# Altium PCB Copy of PCB1.PcbDoc
Units mil, origin at the board's own origin, x right, y up, seen from the top; angles counter-clockwise.
Board outline 1840 x 2165 mil, 4 copper layers (Top Layer, Int1 (GND), Int2 (SIGNAL), Bottom Layer), stack 43.712 mil thick; 22 components, 24 nets, 92 pads, 12 vias.
Unrouted connection lines stored in the file: 26.
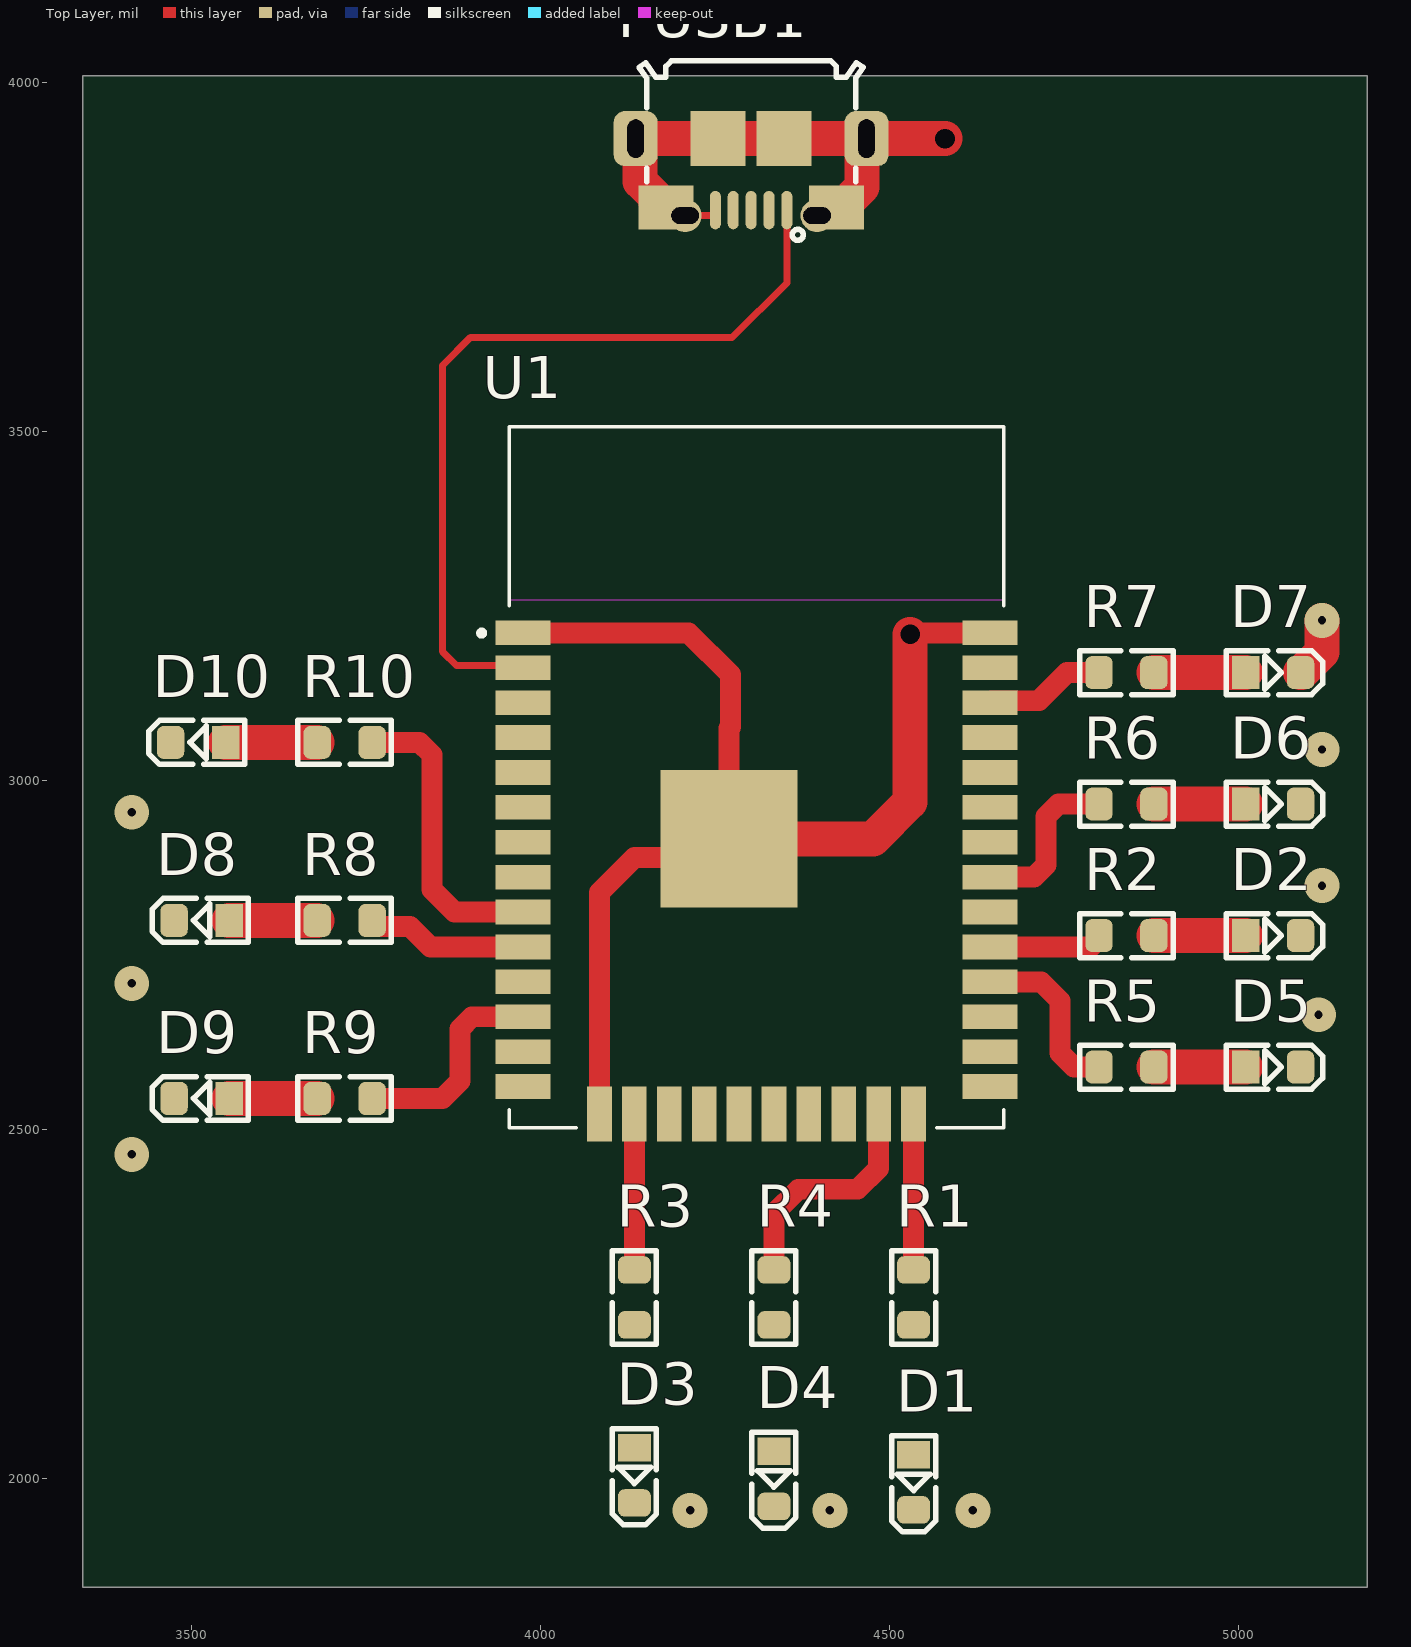
[diagram p0: Top Layer view]
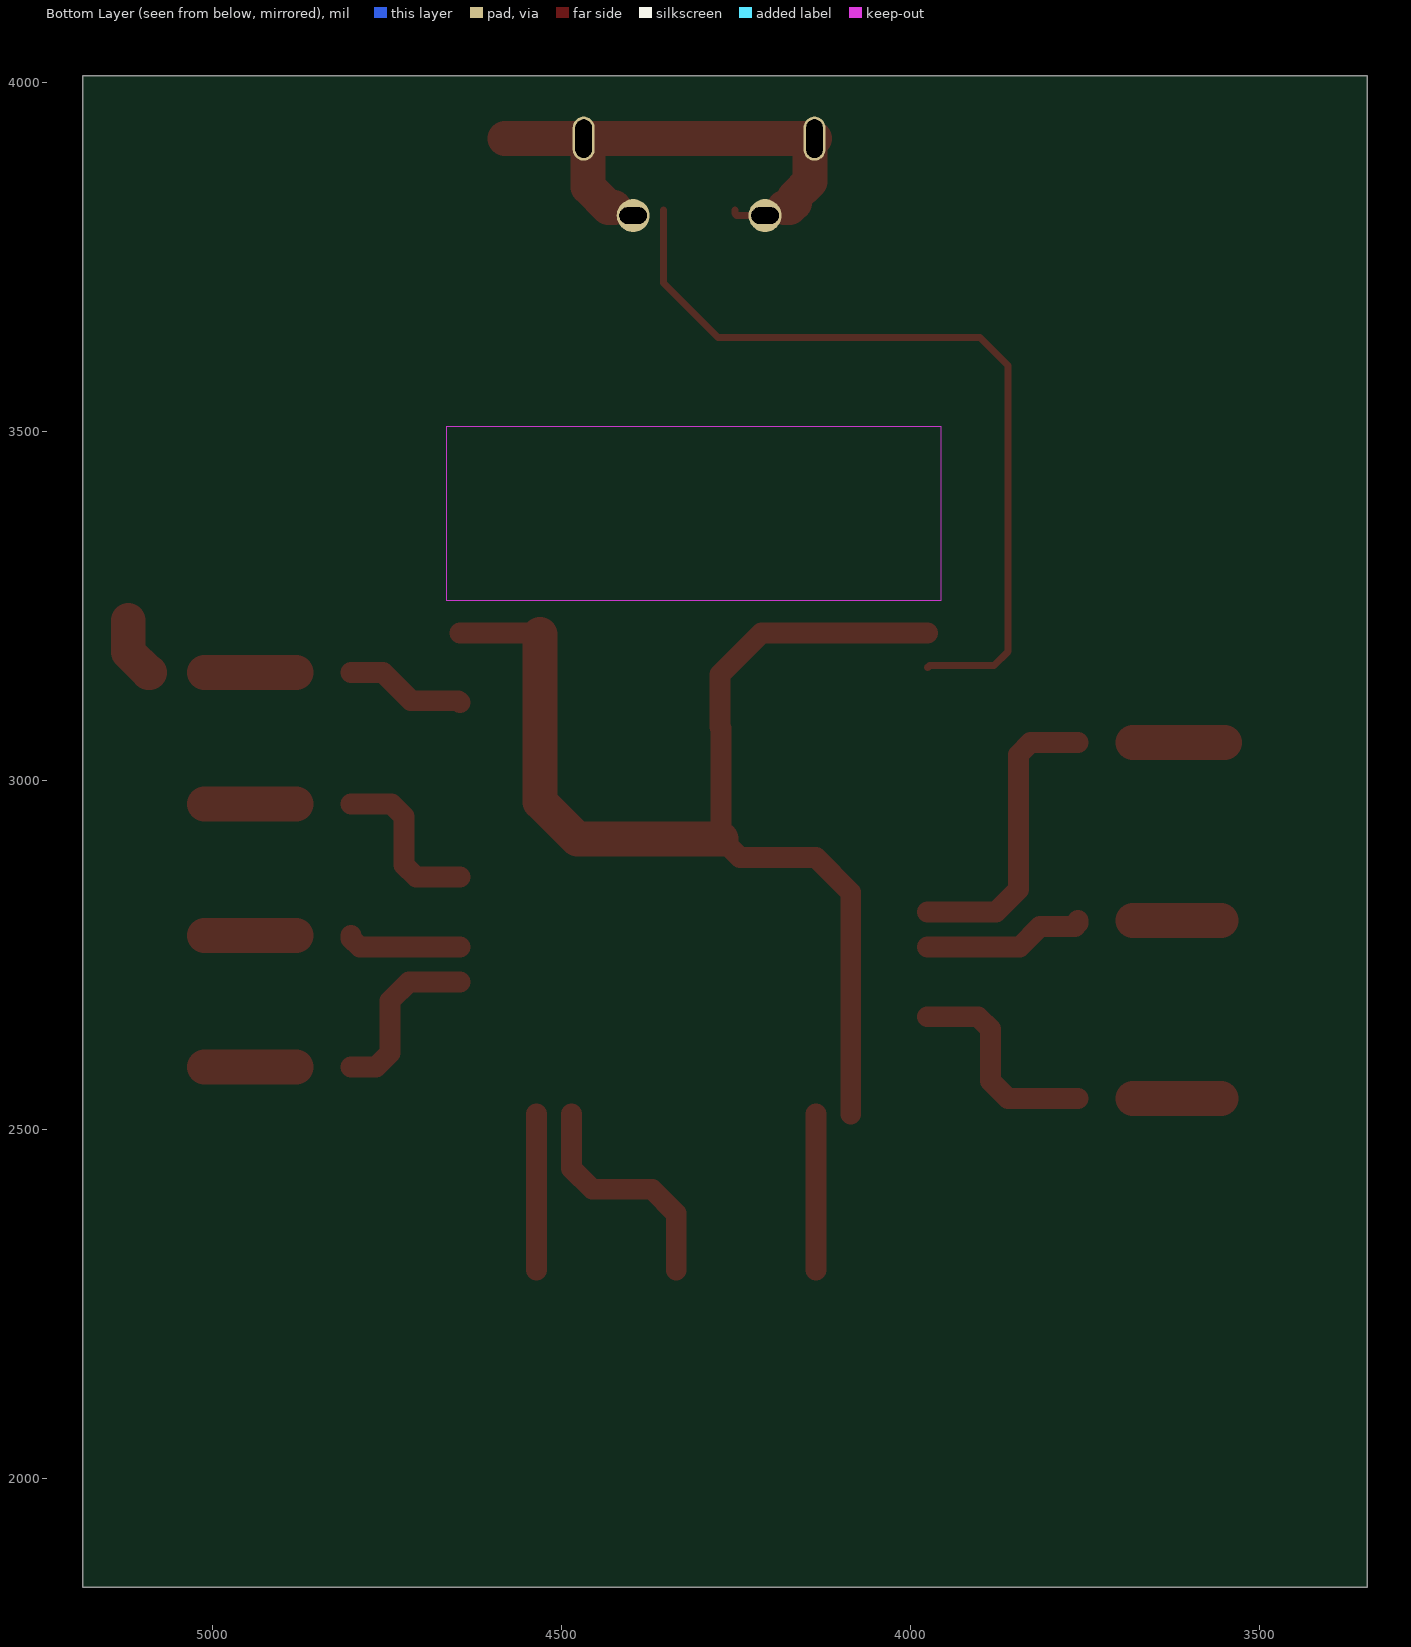
[diagram p1: Bottom Layer view, seen from below]
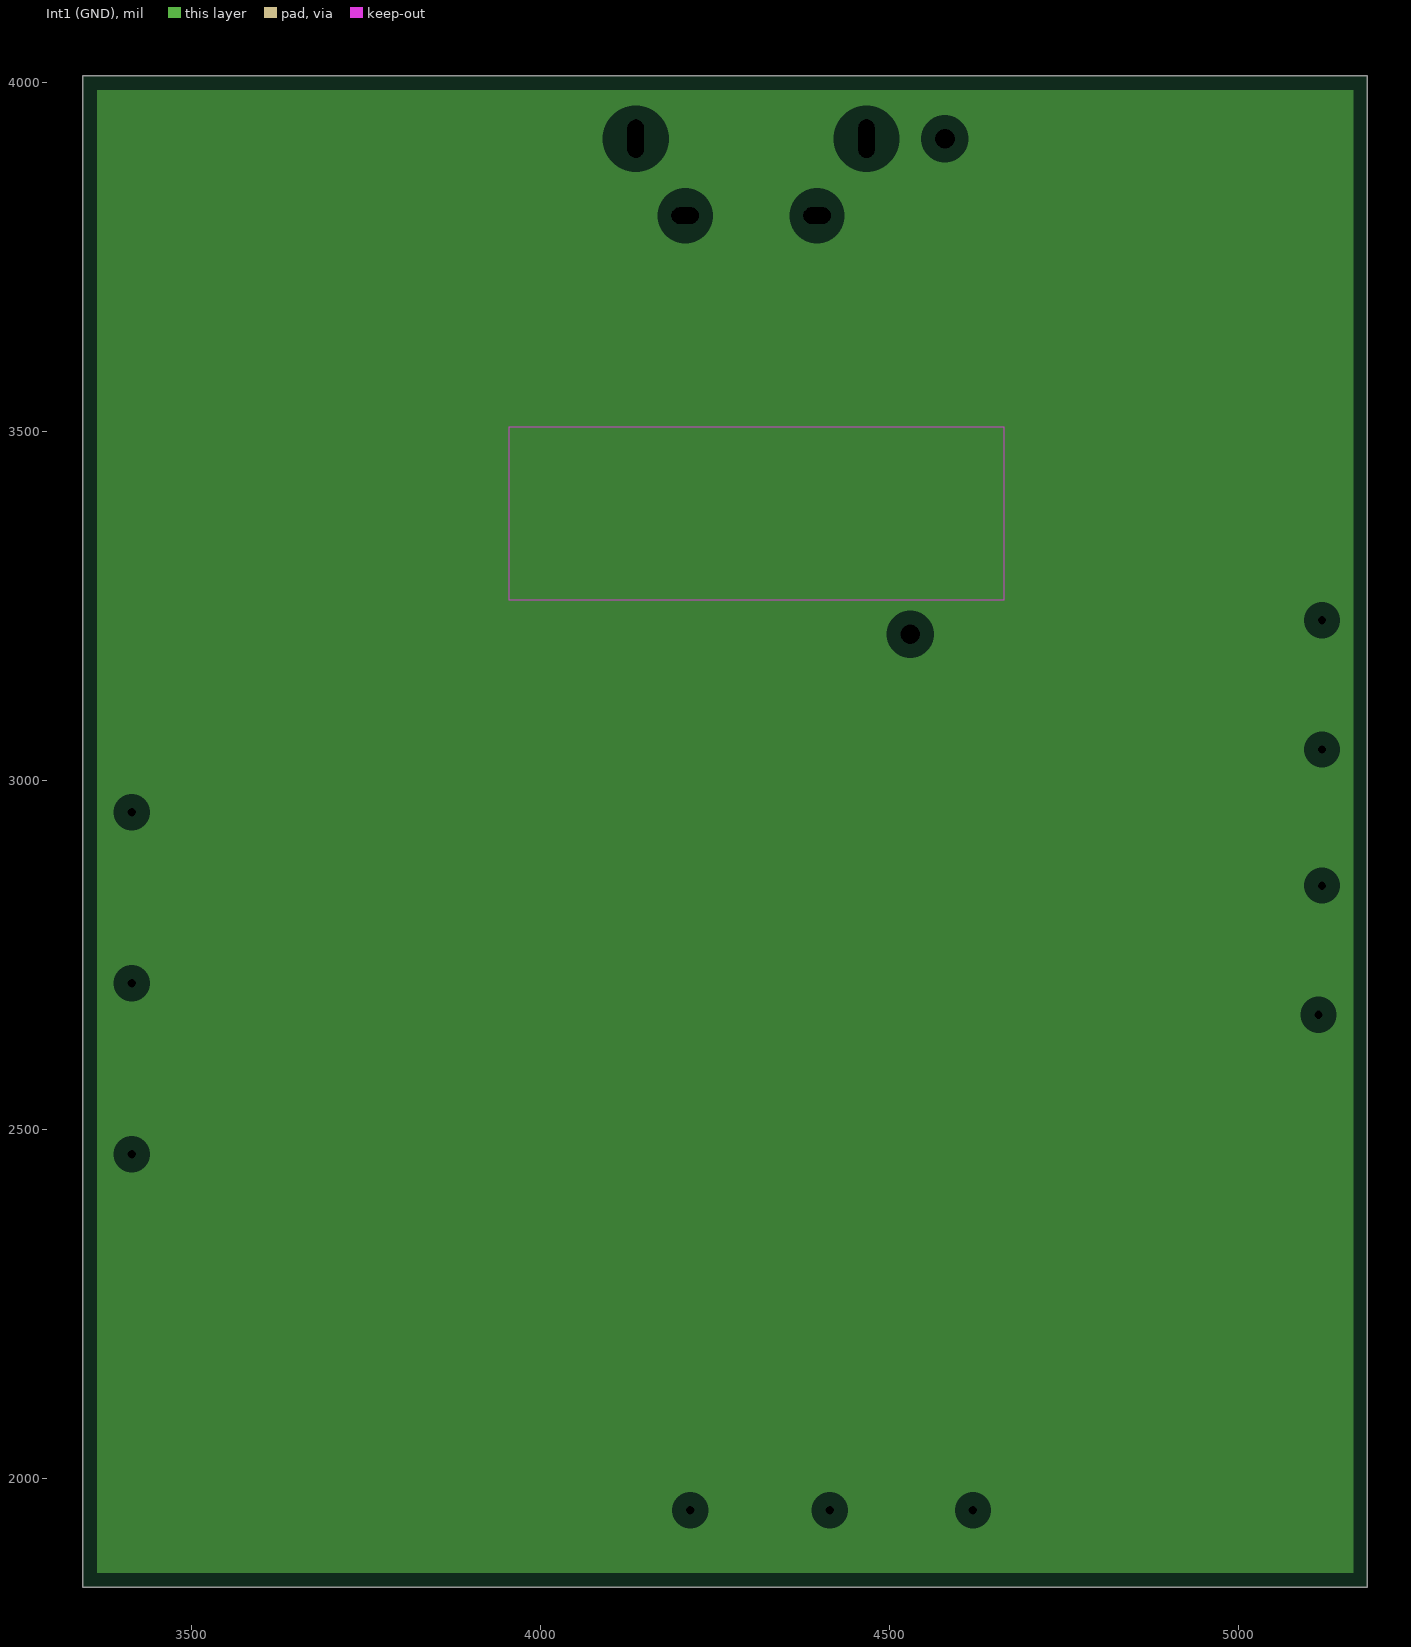
[diagram p2: Int1 (GND), clearances drawn from the general rule]
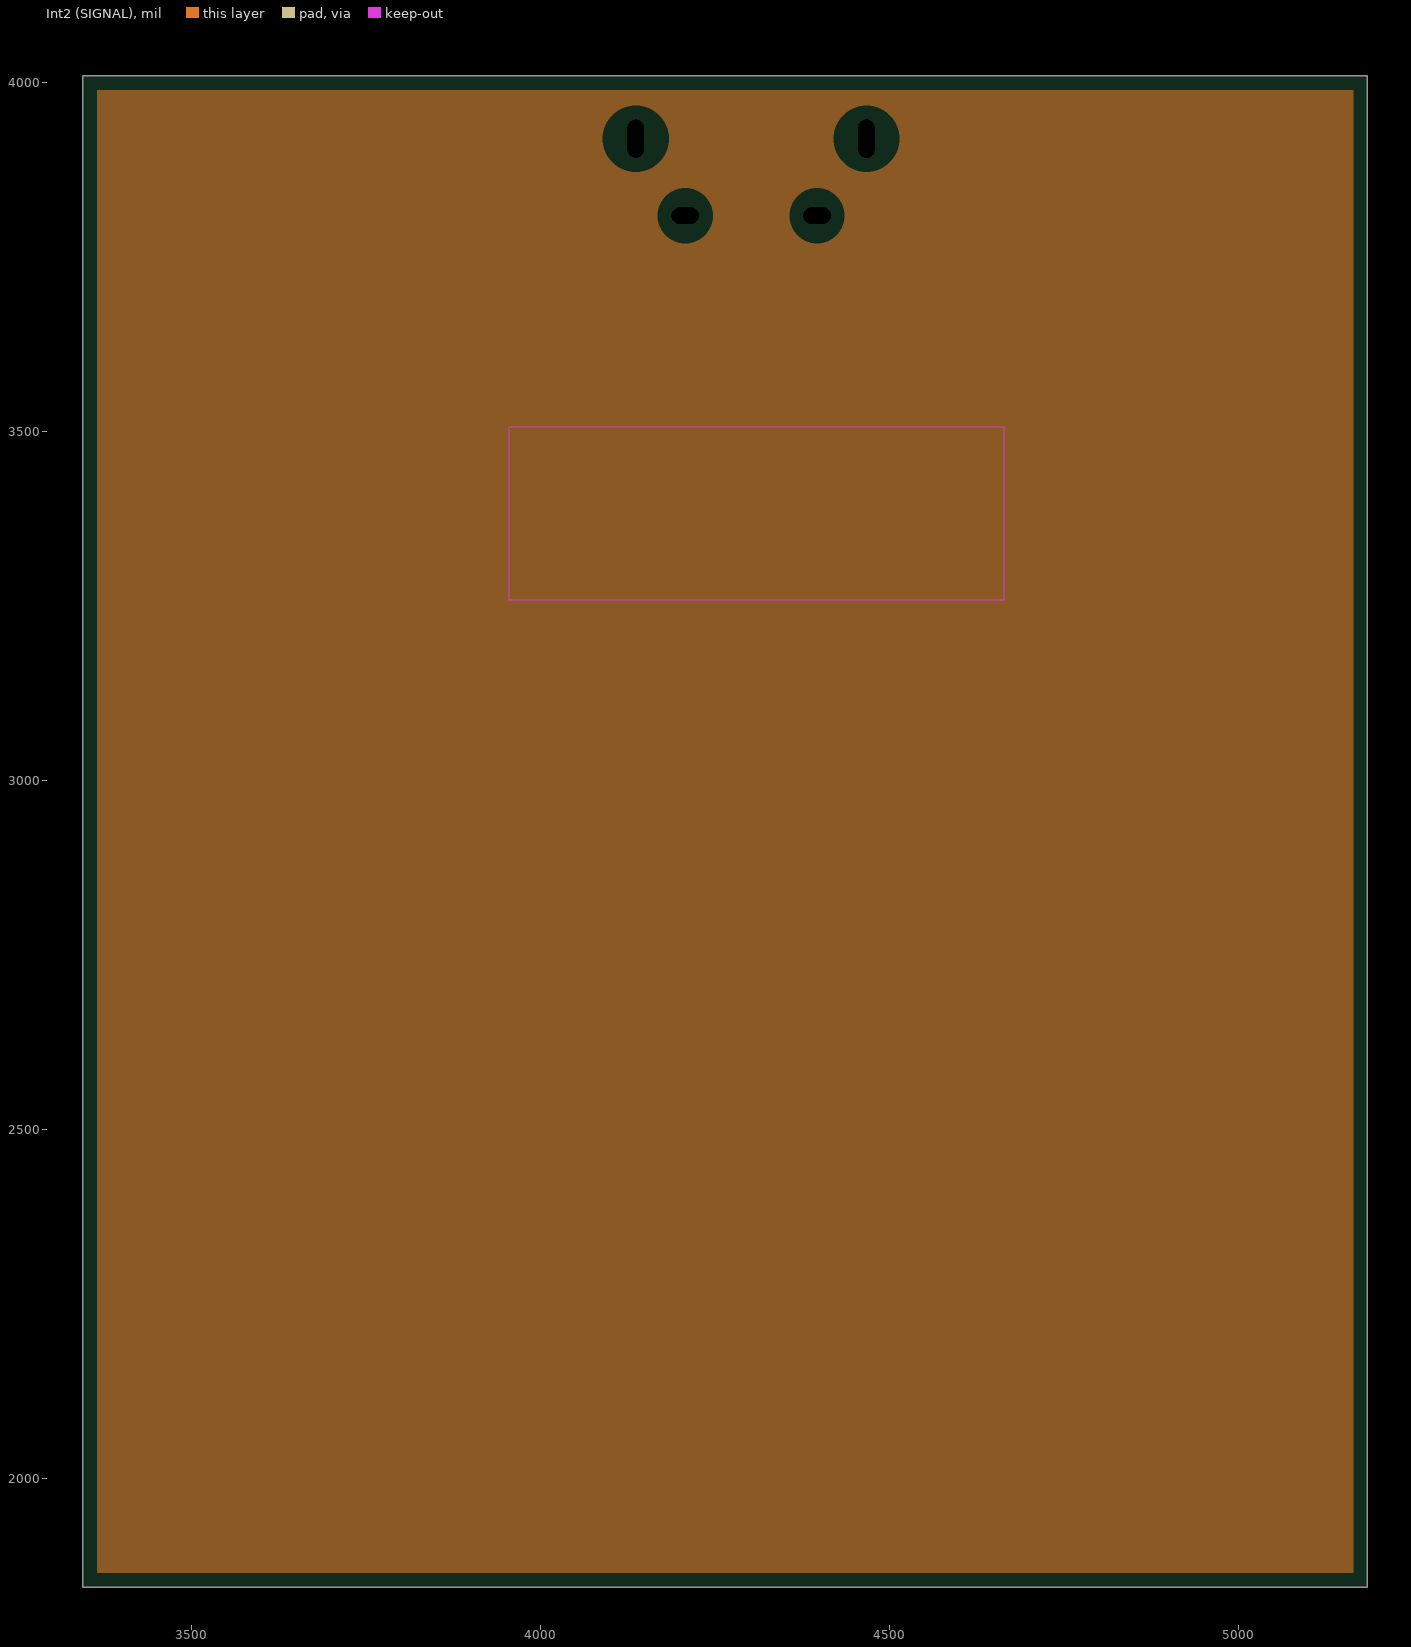
[diagram p3: Int2 (SIGNAL), clearances drawn from the general rule]

## Layer stack, top to bottom
Top Solder: solder mask 1, SM-001, Dk 4
Top Layer: signal copper 1.378
Dielectric 1: prepreg 5.1, PP-017, Dk 4.3
Int1 (GND): plane copper 1.378, net GND
Dielectric 3: core 28, Core-039, Dk 4.8
Int2 (SIGNAL): plane copper 1.378
Dielectric 5: prepreg 5.1, PP-017, Dk 4.3
Bottom Layer: signal copper 1.378
Bottom Solder: solder mask 1, SM-001, Dk 4

## Board outline
3345,1845 5185,1845 5185,4010 3345,4010

## Design rules (kind name [scope] priority, off if disabled: settings)
Clearance [All] p1: gap=10 ignorepadtopadclearanceinfootprint=FALSE except(0: Arc-Hole Track-Hole SMDPad-Hole THPad-Hole Via-Hole Fill-Hole Poly-Hole Region-Hole Text-Hole)
PlaneClearance [All] p1: clearance=20
PlaneConnect [All] p1: planeconnectstyle=Relief reliefexpansion=20 reliefentries=4 reliefconductorwidth=10 reliefairgap=10
PolygonConnect [All] p1: connectstyle=Relief reliefconductorwidth=10 reliefentries=4 polygonreliefangle="90 Angle" airgapwidth=10
RoutingVias [All] p1: holewidth=28 width=50 viastyle="Through Hole" minholewidth=28 minwidth=50 maxholewidth=28 maxwidth=50
SolderMaskExpansion [All] p1: expansion=4 istentingtop=FALSE
SupplyNets "Schematic Supply Nets_1" [InNet('VCC')] p1: voltage=0.000
SupplyNets "Schematic Supply Nets" [InNet('GND')] p2: voltage=0.000
Width [All] p1: maxlimit=50 minlimit=10 preferedwidth=30 minimp=50.000000 maximp=50.000000 favimp=50.000000
28 further rules are at their usual default settings.

## Components (designator, comment, footprint, x,y, rotation, side; value= is the part's Value field where it differs from the comment)
D1 "LED0805" LED0805 4535,1995 r270 top
D2 "LED0805" LED0805 5050,2778.33 r0 top
D3 "LED0805" LED0805 4135,2005 r270 top
D4 "LED0805" LED0805 4335,2000 r270 top
D5 "LED0805" LED0805 5050,2590 r0 top
D6 "LED0805" LED0805 5050,2966.67 r0 top
D7 "LED0805" LED0805 5050,3155 r0 top
D8 "LED0805" LED0805 3515,2800 r180 top
D9 "LED0805" LED0805 3515,2545 r180 top
D10 "LED0805" LED0805 3510,3055 r180 top
PUSB1 "CONN_USB_MICROB" USB_MICRO_B_BM_SHS 4302.24,3817.64 r0 top
R1 "330 ohms" R0805 4535,2260 r270 top
R2 "330 ohms" R0805 4840,2778.33 r0 top
R3 "330 ohms" R0805 4135,2260 r270 top
R4 "330 ohms" R0805 4335,2260 r270 top
R5 "330 ohms" R0805 4840,2590 r0 top
R6 "330 ohms" R0805 4840,2966.67 r0 top
R7 "330 ohms" R0805 4840,3155 r0 top
R8 "330 ohms" R0805 3720,2800 r180 top
R9 "330 ohms" R0805 3720,2545 r180 top
R10 "330 ohms" R0805 3720,3055 r180 top
U1 "ESP32-WROOM-32(8MB)" MODULE_ESP32-WROOM-32(8MB) 4310,3005 r0 top

## Footprints (in the part's own frame and the unit in brackets; to place one, negate y for a bottom-side part, rotate by r counter-clockwise, add the part's x,y. Pads: shape width x height; smd on the part's side, far side on the other; paste and mask are expansions set on the pad)
LED0805 [mm] "LED SMD 0805"
  rect 1x1.2 smd paste-2 mask+0.075: 1(-1,0)
  rrect50% 1x1.2 smd paste-2 mask+0.075: 2(1,0)
  Top Layer pour cut-out: -0.5,0.8 0.5,0.8 0.5,-0.8 -0.5,-0.8
  silkscreen extent -1.7,-0.8 1.8,0.8, body extent -1.01,-0.62 1.01,0.63, height 1.1
MODULE_ESP32-WROOM-32(8MB) [mm]
  rect 2x0.9 smd: 1(-8.5,5.26) 2(-8.5,3.99) 3(-8.5,2.72) 4(-8.5,1.45) 5(-8.5,0.18) 6(-8.5,-1.09) 7(-8.5,-2.36) 8(-8.5,-3.63) 9(-8.5,-4.9) 10(-8.5,-6.17) 11(-8.5,-7.44) 12(-8.5,-8.71) 13(-8.5,-9.98) 14(-8.5,-11.25) 25(8.5,-11.25) 26(8.5,-9.98) 27(8.5,-8.71) 28(8.5,-7.44) 29(8.5,-6.17) 30(8.5,-4.9) 31(8.5,-3.63) 32(8.5,-2.36) 33(8.5,-1.09) 34(8.5,0.18) 35(8.5,1.45) 36(8.5,2.72) 37(8.5,3.99) 38(8.5,5.26)
  rect 0.9x2 smd: 15(-5.715,-12.25) 16(-4.445,-12.25) 17(-3.175,-12.25) 18(-1.905,-12.25) 19(-0.635,-12.25) 20(0.635,-12.25) 21(1.905,-12.25) 22(3.175,-12.25) 23(4.445,-12.25) 24(5.715,-12.25)
  rect 5x5 smd paste-3: 39(-1,-2.24)
  Keep-Out Layer region: 9,6.45 -9,6.45 -9,12.75 9,12.75
  silkscreen extent -10.1,-12.75 9,12.75, body extent -9,-12.75 9,12.75, height 3.2
R0805 [mm] "CHIP RESISTOR 1/8 WATT ,2.0X1.3mm, 0805, 2012"
  rrect50% 1x1.2 smd paste-0.1 mask+0.075: 1(-1,0) 2(1,0)
  Top Layer pour cut-out: -0.5,0.8 0.5,0.8 0.5,-0.8 -0.5,-0.8
  silkscreen extent -1.7,-0.8 1.7,0.8, body extent -1.15,-0.67 1.15,0.68, height 0.76
USB_MICRO_B_BM_SHS [mm] "CONN, USB Micro B - Standard (Bottom mount), Shell SMD, 473460001, ZX62-AB-5PA"
  oval 0.4x1.4 smd mask+0.05: 1(1.3,0) 2(0.65,0) 3(0,0) 4(-0.65,0) 5(-1.3,0)
  round 1.2 hole 0.6 slot 1 at 0 deg mask+0.05: SH1(-2.4,-0.2) SH2(2.4,-0.2)
  rect 2x2 smd: SH3(-1.2,2.6) SH4(1.2,2.6)
  rrect50% 1.6x2 / inner oval 0.8x1.6 / far side oval 0.8x1.6 hole 0.6 slot 1.4 at 90 deg: SH5(-4.2,2.6) SH6(4.2,2.6)
  rect 2x1.6 smd: SH7(-3.1,0.1) SH8(3.1,0.1)
  silkscreen extent -4.08,-1.1 4.08,5.43, body extent -3.99,-0.3 3.99,5.13, height 2.72

## Part data
D1 D2 D3 D4 D5 D6 D7 D8 D9 D10: library part LED_SMD_0805, "LED, SMD, 0805", ASSEMBLY=ASSEMBLY, DESC=DESCRIPTION, MANF=MANF, MANF_P#=MANF_PART#, PARAM2=2.2V, PRICE=PRICE
PUSB1: library part CONN_USB_MICRO_B_BM_SHS, "CONN, USB, MICRO B, R/A, SMD, BOTTOM MOUNT", MANF=Molex, MANF_P#=47346-0001, MANF_P#2="HIROSE ZX62-AB-5PA", PARAM="1.8A, -20~85oC", PARAM2=30VAC, PRICE=0.75$
R1 R2 R3 R4 R5 R6 R7 R8 R9 R10: library part RES_SMD_0805, "RESISTOR, SMD", ASSEMBLY=ASSEMBLY, DESC=DESCRIPTION, DIST#=MOUSER, MANF=-, MANF_P#=-, PARAM=-W, PARAM2=1%, PRICE="100= 0.5$"
U1: "Bluetooth, WiFi 802.11b/g/n, Bluetooth v4.2 +EDR, Class 1, 2 and 3 Transceiver Module 2.4GHz ~ 2.5GHz Antenna Not Included, U.FL Surface Mount", Package="Module Espressif Systems", Availability="Not in stock", Check_prices=https://www.snapeda.com/parts/ESP32-WROOM-32%20(8MB)/Espressif+Systems/view-part/?ref=eda, MF="Espressif Systems", MP="ESP32-WROOM-32 (8MB)", PRICE=None, SnapEDA_Link=https://www.snapeda.com/parts/ESP32-WROOM-32%20(8MB)/Espressif+Systems/view-part/?ref=snap

## Via types
v1: diameter 50, hole 12, Top Layer to Int1 (GND), 10 vias
v2: diameter 10 (per signal layer), hole 28, Top Layer to Int1 (GND), 2 vias

## Nets (pads, with @x,y where several pads share a name; then routed paths per layer and width w, separated by ;. In a path a pad name is that pad's centre, name@x,y a point inside that pad or via, vN(x,y) a via of type N, cw(c..) or ccw(c..) an arc to the next point about the centre after c; other vN are vias at no path point)
GND: D1.2 D2.2 D3.2 D4.2 D5.2 D6.2 D7.2 D8.2 D9.2 D10.2 PUSB1.5 PUSB1.SH1 PUSB1.SH2 PUSB1.SH3 PUSB1.SH4 PUSB1.SH5 PUSB1.SH6 PUSB1.SH7 PUSB1.SH8 U1.1 U1.15 U1.38 U1.39 | length 2553.2
  Top Layer w10: PUSB1.SH1 4248.41,3809.76 4251.06,3812.42 PUSB1.5
  Top Layer w30: U1.1 4212.91,3212.09 4272.57,3152.43 4272.57,3077.3 4270.63,3075.36 U1.39 4243.82,2890 4135,2890 4085,2840 U1.15 ; v2(4530,3210) 4532.09,3212.09 U1.38
  Top Layer w50: PUSB1.SH7 4172.32,3821.57 4165.83,3828.07 4165.83,3835.94 4143.39,3858.39 4143.39,3913.5 PUSB1.SH5 PUSB1.SH3 PUSB1.SH4 PUSB1.SH6 ; U1.39 4476.81,2916.81 4530,2970 v2(4530,3210) ; PUSB1.SH8 4432.17,3821.57 4461.1,3850.51 4461.1,3913.5 PUSB1.SH6 ; v2(4580,3920) PUSB1.SH6 ; D7.2 5090.71,3155 5120,3184.29 v1(5120,3230)
  other v1: 4215,1955 4415,1955 4620,1955 3415,2465 5115,2665 3415,2710 5120,2850 3415,2955 5120,3045
NetD1_1: D1.1 R1.2
NetD2_1: D2.1 R2.2 | length 131.3
  Top Layer w50: R2.2 D2.1
NetD3_1: D3.1 R3.2
NetD4_1: D4.1 R4.2
NetD5_1: D5.1 R5.2 | length 131.3
  Top Layer w50: R5.2 D5.1
NetD6_1: D6.1 R6.2 | length 131.3
  Top Layer w50: R6.2 D6.1
NetD7_1: D7.1 R7.2 | length 131.3
  Top Layer w50: R7.2 D7.1
NetD8_1: D8.1 R8.2 | length 126.3
  Top Layer w50: D8.1 R8.2
NetD9_1: D9.1 R9.2 | length 126.3
  Top Layer w50: D9.1 R9.2
NetD10_1: D10.1 R10.2 | length 131.3
  Top Layer w50: D10.1 R10.2
NetPUSB1_2: PUSB1.2 U1.35
NetPUSB1_3: PUSB1.3 U1.34
NetR1_1: R1.1 U1.24 | length 223.3
  Top Layer w30: R1.1 U1.24
NetR2_1: R2.1 U1.29 | length 165
  Top Layer w30: U1.29 4788.32,2762.09 4800.63,2774.4 R2.1
NetR3_1: R3.1 U1.16 | length 223.3
  Top Layer w30: R3.1 U1.16
NetR4_1: R4.1 U1.23 | length 335.3
  Top Layer w30: R4.1 4335,2380 4370,2415 4455,2415 4485,2445 U1.23
NetR5_1: R5.1 U1.28 | length 250.5
  Top Layer w30: U1.28 4717.91,2712.09 4745,2685 4745,2610 4765,2590 R5.1
NetR6_1: R6.1 U1.31 | length 240
  Top Layer w30: U1.31 4707.43,2862.09 4725,2879.66 4725,2949.09 4742.57,2966.67 R6.1
NetR7_1: R7.1 U1.36 | length 173.8
  Top Layer w30: U1.36 4647.36,3114.8 4714.8,3114.8 4755,3155 R7.1
NetR8_1: R8.1 U1.10 | length 234
  Top Layer w30: R8.1 3759.37,2796.06 3764.06,2791.38 3813.62,2791.38 3842.91,2762.09 U1.10
NetR9_1: R9.1 U1.12 | length 308.1
  Top Layer w30: R9.1 3860,2545 3885,2570 3885,2644.51 3902.57,2662.09 U1.12
NetR10_1: R10.1 U1.9 | length 429.8
  Top Layer w30: R10.1 3827.43,3055 3845,3037.43 3845,2844.17 3877.09,2812.09 U1.9
VCC: PUSB1.1 U1.2 U1.3 | length 1181.5
  Top Layer w10: U1.2 3972.44,3165 3880,3165 3860,3185 3860,3595 3900,3635 4275,3635 4353.43,3713.43 PUSB1.1
pads on no net: PUSB1.4 U1.4 U1.5 U1.6 U1.7 U1.8 U1.11 U1.13 U1.14 U1.17 U1.18 U1.19 U1.20 U1.21 U1.22 U1.25 U1.26 U1.27 U1.30 U1.32 U1.33 U1.37

## Polygon pours and split planes (outlines as drawn)
no net on Int2 (SIGNAL) (split plane): 5164.9,1865.1 3365.1,1865.1 3365.1,3989.9 5164.9,3989.9
no net on Int1 (GND) (split plane): 5164.9,1865.1 3365.1,1865.1 3365.1,3989.9 5164.9,3989.9

## Text inside footprints (layer, text, board x,y; h text height)
PUSB1: Mechanical 13 "PCB EDGE" at 4195.94,3990.87 h31.5
U1: Mechanical 13 "ANTENNA" at 4073.78,3359.33 h70